# EAGLE board main3 (EAGLE 8.1.0)
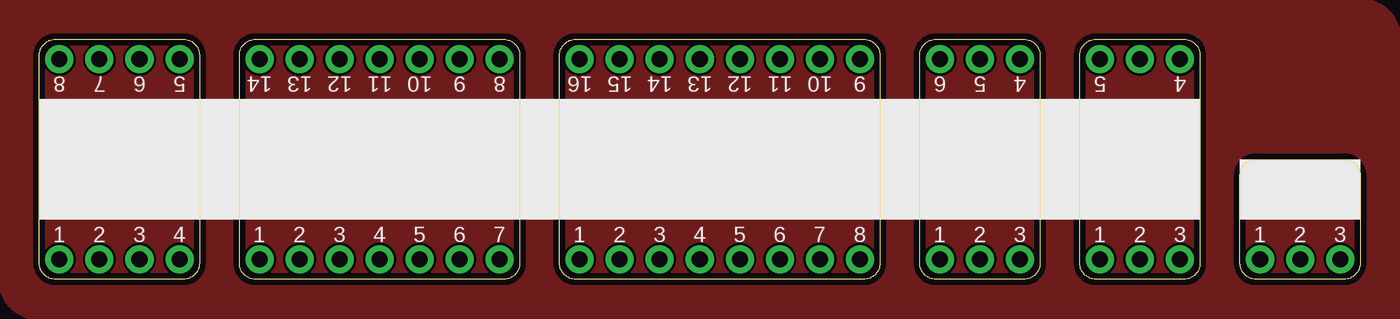
[diagram p0: board, top side]
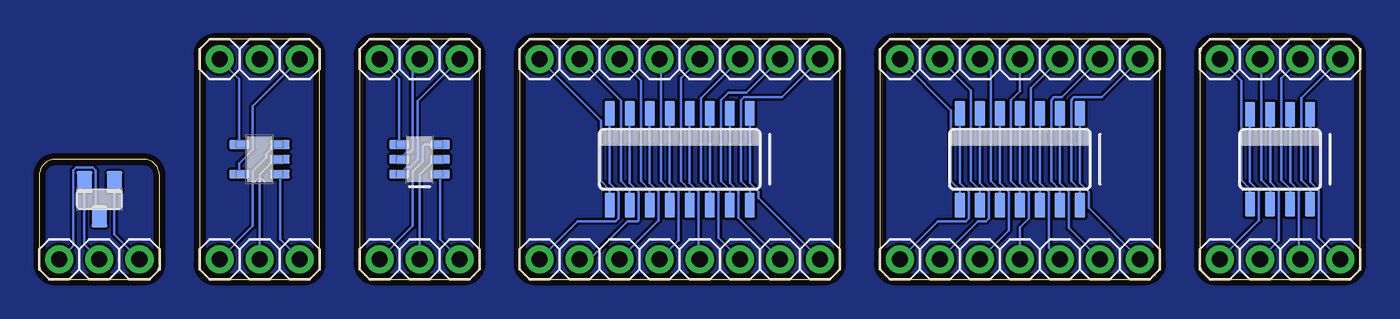
[diagram p1: board, bottom side, seen from below]

Size 83.82 x 15.24 mm. Coordinates in mm from the lower left corner, seen from the top.
Outline: 9.16,0 1,0 arc-90 0,1 0,14.24 arc-90 1,15.24 9.16,15.24 arc-90 10.16,14.24 10.16,1 arc-90 9.16,0
Outline: 29.48,0 13.7,0 arc-90 12.7,1 12.7,14.24 arc-90 13.7,15.24 29.48,15.24 arc-90 30.48,14.24 30.48,1 arc-90 29.48,0
Outline: 53.34,14.24 53.34,1 arc-90 52.34,0 34.02,0 arc-90 33.02,1 33.02,14.24 arc-90 34.02,15.24 52.34,15.24 arc-90 53.34,14.24
Outline: 62.5,0 56.88,0 arc-90 55.88,1 55.88,14.24 arc-90 56.88,15.24 62.5,15.24 arc-90 63.5,14.24 63.5,1 arc-90 62.5,0
Outline: 66.04,1 66.04,14.24 arc-90 67.04,15.24 72.66,15.24 arc-90 73.66,14.24 73.66,1 arc-90 72.66,0 67.04,0 arc-90 66.04,1
Outline: 82.82,0 77.2,0 arc-90 76.2,1 76.2,6.62 arc-90 77.2,7.62 82.82,7.62 arc-90 83.82,6.62 83.82,1 arc-90 82.82,0
Copper layers (1*16): Top 0.0356mm / dielectric 1.5011mm / Bottom 0.0356mm
Design rules "oshpark-2layer": minimum track width 6mil, minimum drill 13mil, track to track 6mil, track to pad 6mil, pad to pad 6mil, via to via 6mil, smd to smd 6mil, copper to edge 15mil, drill to drill 6mil, minimum pad ring 7mil, minimum via ring 7mil, stop-mask expansion 2.5mil, vias tented up to drill 0mil, thermal gap 10mil

## Footprints (pad centres in the part's own frame; a part is rotated, then mirrored left to right if it is on the bottom)
SO08 = smd 0.66 x 1.6: 1 -1.905,-2.857; 2 -0.635,-2.857; 3 0.635,-2.857; 4 1.905,-2.857; 5 1.905,2.857; 6 0.635,2.857; 7 -0.635,2.857; 8 -1.905,2.857
SO14 = smd 0.66 x 1.6: 1 -3.81,-2.915; 2 -2.54,-2.915; 3 -1.27,-2.915; 4 0,-2.915; 5 1.27,-2.915; 6 2.54,-2.915; 7 3.81,-2.915; 8 3.81,2.915; 9 2.54,2.915; 10 1.27,2.915; 11 0,2.915; 12 -1.27,2.915; 13 -2.54,2.915; 14 -3.81,2.915
SO16 = smd 0.66 x 1.6: 1 -4.445,-2.915; 2 -3.175,-2.915; 3 -1.905,-2.915; 4 -0.635,-2.915; 5 0.635,-2.915; 6 1.905,-2.915; 7 3.175,-2.915; 8 4.445,-2.915; 9 4.445,2.915; 10 3.175,2.915; 11 1.905,2.915; 12 0.635,2.915; 13 -0.635,2.915; 14 -1.905,2.915; 15 -3.175,2.915; 16 -4.445,2.915
1X04/OCT = drill 1.016 pad 1.778: 1 -3.81,0; 2 -1.27,0; 3 1.27,0; 4 3.81,0
1X07/OCT = drill 1.016 pad 1.778: 1 -7.62,0; 2 -5.08,0; 3 -2.54,0; 4 0,0; 5 2.54,0; 6 5.08,0; 7 7.62,0
1X08 = drill 1.016 pad 1.778: 1 -8.89,0; 2 -6.35,0; 3 -3.81,0; 4 -1.27,0; 5 1.27,0; 6 3.81,0; 7 6.35,0; 8 8.89,0
1X03/OCT = drill 1.016 pad 1.778: 1 -2.54,0; 2 0,0; 3 2.54,0
SOT95P280X145-6N = smd 1.27 x 0.559: 1 -1.295,0.94; 2 -1.295,0; 3 -1.295,-0.94; 4 1.295,-0.94; 5 1.295,0; 6 1.295,0.94
SOT95P280X145-5N = smd 1.27 x 0.559: 1 -1.295,0.94; 2 -1.295,0; 3 -1.295,-0.94; 4 1.295,-0.94; 5 1.295,0.94
SOT23 = smd 1 x 1.4: 1 -0.95,-1.1; 2 0.95,-1.1; 3 0,1.1

## Placement (x,y rotation side)
IC1  TL072D  [SO08]  5.08,7.62 180 bottom
IC2  TL074D  [SO14]  21.59,7.62 180 bottom
IC3  CD4051D  [SO16]  43.18,7.62 180 bottom
JP1  [1X04/OCT]  5.08,1.27 180 bottom
JP2  [1X04/OCT]  5.08,13.97 0 bottom
JP3  [1X07/OCT]  21.59,1.27 180 bottom
JP4  [1X07/OCT]  21.59,13.97 180 bottom
JP5  [1X08]  43.18,1.27 180 bottom
JP6  [1X08]  43.18,13.97 180 bottom
JP7  [1X03/OCT]  59.69,1.27 180 bottom
JP8  [1X03/OCT]  59.69,13.97 0 bottom
JP9  [1X03/OCT]  69.85,1.27 180 bottom
JP10  [1X03/OCT]  69.85,13.97 0 bottom
JP11  [1X03/OCT]  80.01,1.27 180 bottom
U1  SN74LVC2G17DBVT  [SOT95P280X145-6N]  59.69,7.62 180 bottom
U2  SN74LVC1G08DBVT  [SOT95P280X145-5N]  69.85,7.62 180 bottom
U$1  MMBT3904  [SOT23]  80.01,5.08 180 bottom

## Library data of the parts
IC1-IC3 JP1-JP11 U$1 = _JC
U1 = _JC; MPN: SN74LVC2G17DBVT; OC_FARNELL: 1739699; OC_NEWARK: 34R8936; PACKAGE: SOT-23-6; SUPPLIER: Texas Instruments
U2 = _JC; MPN: SN74LVC1G08DBVT; OC_FARNELL: 1236324; OC_NEWARK: 32H6345; PACKAGE: SOT-23-5; SUPPLIER: Texas Instruments

## Nets
N$1: IC1.1 JP1.1
N$2: IC1.2 JP1.2
N$3: IC1.3 JP1.3
N$4: IC1.4 JP1.4
N$5: IC1.5 JP2.1
N$6: IC1.6 JP2.2
N$7: IC1.7 JP2.3
N$8: IC1.8 JP2.4
N$9: IC2.1 JP3.1
N$10: IC2.2 JP3.2
N$11: IC2.3 JP3.3
N$12: IC2.4 JP3.4
N$13: IC2.5 JP3.5
N$14: IC2.6 JP3.6
N$15: IC2.7 JP3.7
N$16: IC2.8 JP4.7
N$17: IC2.9 JP4.6
N$18: IC2.10 JP4.5
N$19: IC2.11 JP4.4
N$20: IC2.12 JP4.3
N$21: IC2.13 JP4.2
N$22: IC2.14 JP4.1
N$23: IC3.1 JP5.1
N$24: IC3.2 JP5.2
N$25: IC3.3 JP5.3
N$26: IC3.4 JP5.4
N$27: IC3.5 JP5.5
N$28: IC3.6 JP5.6
N$29: IC3.7 JP5.7
N$30: IC3.8 JP5.8
N$31: IC3.9 JP6.8
N$32: IC3.10 JP6.7
N$33: IC3.11 JP6.6
N$34: IC3.12 JP6.5
N$35: IC3.13 JP6.4
N$36: IC3.14 JP6.3
N$37: IC3.15 JP6.2
N$38: IC3.16 JP6.1
N$39: JP7.1 U1.1
N$40: JP7.2 U1.2
N$41: JP7.3 U1.3
N$42: JP8.1 U1.4
N$43: JP8.2 U1.5
N$44: JP8.3 U1.6
N$45: JP9.1 U2.1
N$46: JP9.2 U2.2
N$47: JP9.3 U2.3
N$48: JP10.1 U2.4
N$49: JP10.3 U2.5
N$50: JP11.1 U$1.1
N$51: JP11.2 U$1.2
N$52: JP11.3 U$1.3

## Tracks (layer width: path | path; a pad name or v marks a point on that pad's centre or on a via)
GND
  pour Bottom: -3.81,19.05 85.09,19.05 arc-90 87.63,16.51 87.63,-3.81 -1.27,-3.81 arc-90 -3.81,-1.27
  pour Top: -2.54,17.78 83.82,17.78 arc-90 86.36,15.24 86.36,-2.54 0,-2.54 arc-90 -2.54,0
N$1
  Bottom 0.152: IC1.1 3.17,6.17 2.62,5.61 2.62,2.62 JP1.1
N$2
  Bottom 0.152: IC1.2 4.45,6.17 3.89,5.61 | 3.89,1.35 JP1.2 | 3.89,5.61 3.89,1.35 | 3.89,5.61 3.89,1.35
N$3
  Bottom 0.152: IC1.3 5.71,6.17 5.16,5.61 5.16,2.46 JP1.3
N$4
  Bottom 0.152: IC1.4 6.99,6.17 6.43,5.61 6.43,3.73 JP1.4
N$5
  Bottom 0.152: IC1.5 6.99,5.74 7.54,6.29 7.54,12.62 JP2.1
N$6
  Bottom 0.152: IC1.6 5.71,5.74 6.27,6.29 6.27,13.89 JP2.2
N$7
  Bottom 0.152: IC1.7 4.45,5.74 5,6.29 5,12.78 JP2.3
N$8
  Bottom 0.152: IC1.8 3.17,5.74 3.73,6.29 3.73,11.51 JP2.4
N$9
  Bottom 0.152: JP3.1 17.22,4.52 17.22,5.55 17.78,6.11 IC2.1
N$10
  Bottom 0.152: IC2.2 19.05,6.11 18.49,5.55 18.49,3.25 JP3.2
N$11
  Bottom 0.152: IC2.3 20.32,6.11 19.76,5.55 19.76,1.98 JP3.3
N$12
  Bottom 0.152: IC2.4 21.59,6.11 21.03,5.55 21.03,3.86 21.59,3.3 | 21.59,3.3 JP3.4 21.59,3.3
N$13
  Bottom 0.152: IC2.5 22.86,6.11 22.3,5.55 22.3,3.1 JP3.5
N$14
  Bottom 0.152: IC2.6 24.13,6.11 23.57,5.55 23.57,3.86 23.75,3.68 24.26,3.68 JP3.6
N$15
  Bottom 0.152: IC2.7 25.4,6.11 24.84,5.55 24.84,3.86 25.02,3.68 26.8,3.68 JP3.7
N$16
  Bottom 0.152: IC2.8 25.4,5.68 25.96,6.24 25.96,10.72 JP4.7
N$17
  Bottom 0.152: IC2.9 24.13,5.68 24.69,6.24 24.69,11.99 JP4.6
N$18
  Bottom 0.152: IC2.10 22.86,5.68 23.42,6.24 23.42,13.26 JP4.5
N$19
  Bottom 0.152: IC2.11 21.59,5.68 22.15,6.24 22.15,11.38 21.59,11.94 JP4.4
N$20
  Bottom 0.152: IC2.12 20.32,5.68 20.88,6.24 20.88,12.14 JP4.3
N$21
  Bottom 0.152: IC2.13 19.05,5.68 19.61,6.24 19.61,11.38 19.43,11.56 18.92,11.56 JP4.2
N$22
  Bottom 0.152: IC2.14 17.78,5.68 18.34,6.24 18.34,11.38 18.16,11.56 16.38,11.56 JP4.1
N$23
  Bottom 0.152: JP5.1 38.18,5.16 38.18,5.55 38.73,6.11 IC3.1
N$24
  Bottom 0.152: JP5.2 39.45,3.89 39.45,5.55 40.01,6.11 IC3.2
N$25
  Bottom 0.152: IC3.3 41.27,6.11 40.72,5.55 40.72,2.62 JP5.3
N$26
  Bottom 0.152: IC3.4 42.55,6.11 41.99,5.55 41.99,1.35 JP5.4
N$27
  Bottom 0.152: IC3.5 43.81,6.11 43.26,5.55 43.26,2.46 JP5.5
N$28
  Bottom 0.152: IC3.6 45.09,6.11 44.53,5.55 44.53,3.73 JP5.6
N$29
  Bottom 0.152: IC3.7 46.35,6.11 45.8,5.55 45.8,3.73 45.87,3.66 46.5,3.66 48.42,1.73 48.74,1.42 48.9,1.27 JP5.7
N$30
  Bottom 0.152: IC3.8 47.62,6.11 47.07,5.55 47.07,3.86 47.25,3.68 49.66,3.68 JP5.8
N$31
  Bottom 0.152: IC3.9 47.62,5.68 48.18,6.24 48.18,10.08 JP6.8
N$32
  Bottom 0.152: IC3.10 46.35,5.68 46.91,6.24 46.91,11.35 JP6.7
N$33
  Bottom 0.152: IC3.11 45.09,5.68 45.64,6.24 45.64,12.62 JP6.6
N$34
  Bottom 0.152: IC3.12 43.81,5.68 44.37,6.24 44.37,13.89 JP6.5
N$35
  Bottom 0.152: IC3.13 42.55,5.68 43.1,6.24 43.1,12.78 JP6.4
N$36
  Bottom 0.152: IC3.14 41.27,5.68 41.83,6.24 41.83,11.51 JP6.3
N$37
  Bottom 0.152: IC3.15 40.01,5.68 40.56,6.24 40.56,11.38 40.08,11.87 38.93,11.87 JP6.2
N$38
  Bottom 0.152: IC3.16 38.73,5.68 39.29,6.24 39.29,11.38 39.11,11.56 36.7,11.56 JP6.1
N$39
  Bottom 0.152: U1.1 58.4,2.52 JP7.1
N$40
  Bottom 0.152: U1.2 58.74,7.62 59.69,6.67 JP7.2
N$41
  Bottom 0.152: U1.3 59.38,8.56 59.51,8.43 59.51,7.46 60.12,6.86 60.12,3.38 JP7.3
N$42
  Bottom 0.152: U1.4 60.98,12.72 JP8.1
N$43
  Bottom 0.152: 60.12,8.23 60.3,8.05 60.55,8.05 U1.5 | 60.12,13.54 JP8.2 | 60.12,8.23 60.12,13.54 | 60.12,8.23 60.12,13.54
N$44
  Bottom 0.152: U1.6 60.55,7.11 60.3,7.11 59.82,7.59 59.82,11.3 JP8.3
N$45
  Bottom 0.152: U2.1 68.56,2.52 JP9.1
N$46
  Bottom 0.152: U2.2 68.9,7.62 69.85,6.67 JP9.2
N$47
  Bottom 0.152: U2.3 68.81,8.56 69.42,7.95 69.42,7.73 70.28,6.87 70.28,3.38 JP9.3
N$48
  Bottom 0.152: U2.4 71.14,12.72 JP10.1
N$49
  Bottom 0.152: U2.5 71.14,7.36 70.28,8.23 70.28,11 JP10.3
N$50
  Bottom 0.152: U$1.1 79.06,2.86 JP11.1
N$51
  Bottom 0.152: U$1.2 80.96,2.22 JP11.2
N$52
  Bottom 0.152: U$1.3 80.23,4.2 80.23,6.9 80.44,7.11 81.48,7.11 81.69,6.9 81.69,2.13 JP11.3

## Text on the board
tNames: 8 | 7 | 6 | 5 | 14 | 13 | 12 | 11 | 10 | 9 | 8 | 16 | 15 | 14 | 13 | 12 | 11 | 10 | 9 | 6 | 5 | 4 | 5 | 4 | 1 | 2 | 3 | 4 | 1 | 2 | 3 | 4 | 5 | 6 | 7 | 1 | 2 | 3 | 4 | 5 | 6 | 7 | 8 | 1 | 2 | 3 | 1 | 2 | 3 | 1 | 2 | 3